# Altium PCB Voeding.PcbDoc
Units mm, origin at the board's own origin, x right, y up, seen from the top; angles counter-clockwise.
Board outline 66.04 x 101.6 mm, 2 copper layers (Top Layer, Bottom Layer); 13 components, 32 nets, 37 pads, 2 vias.
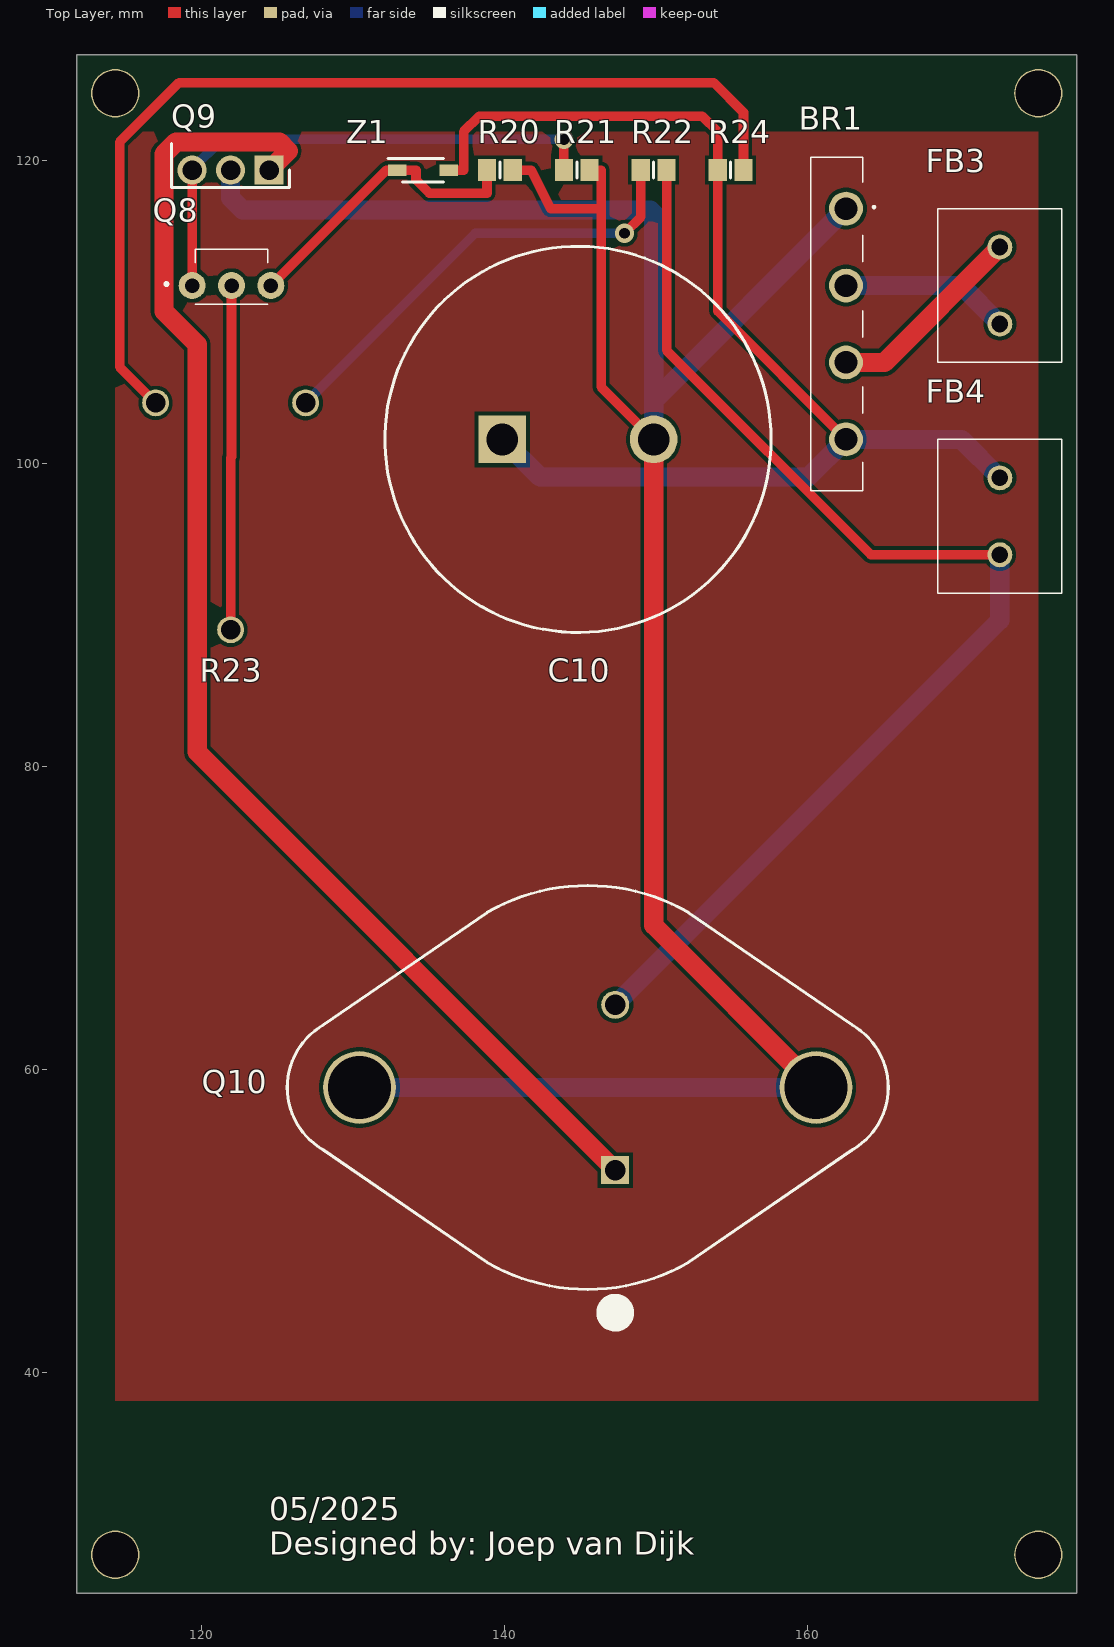
[diagram p0: Top Layer view]
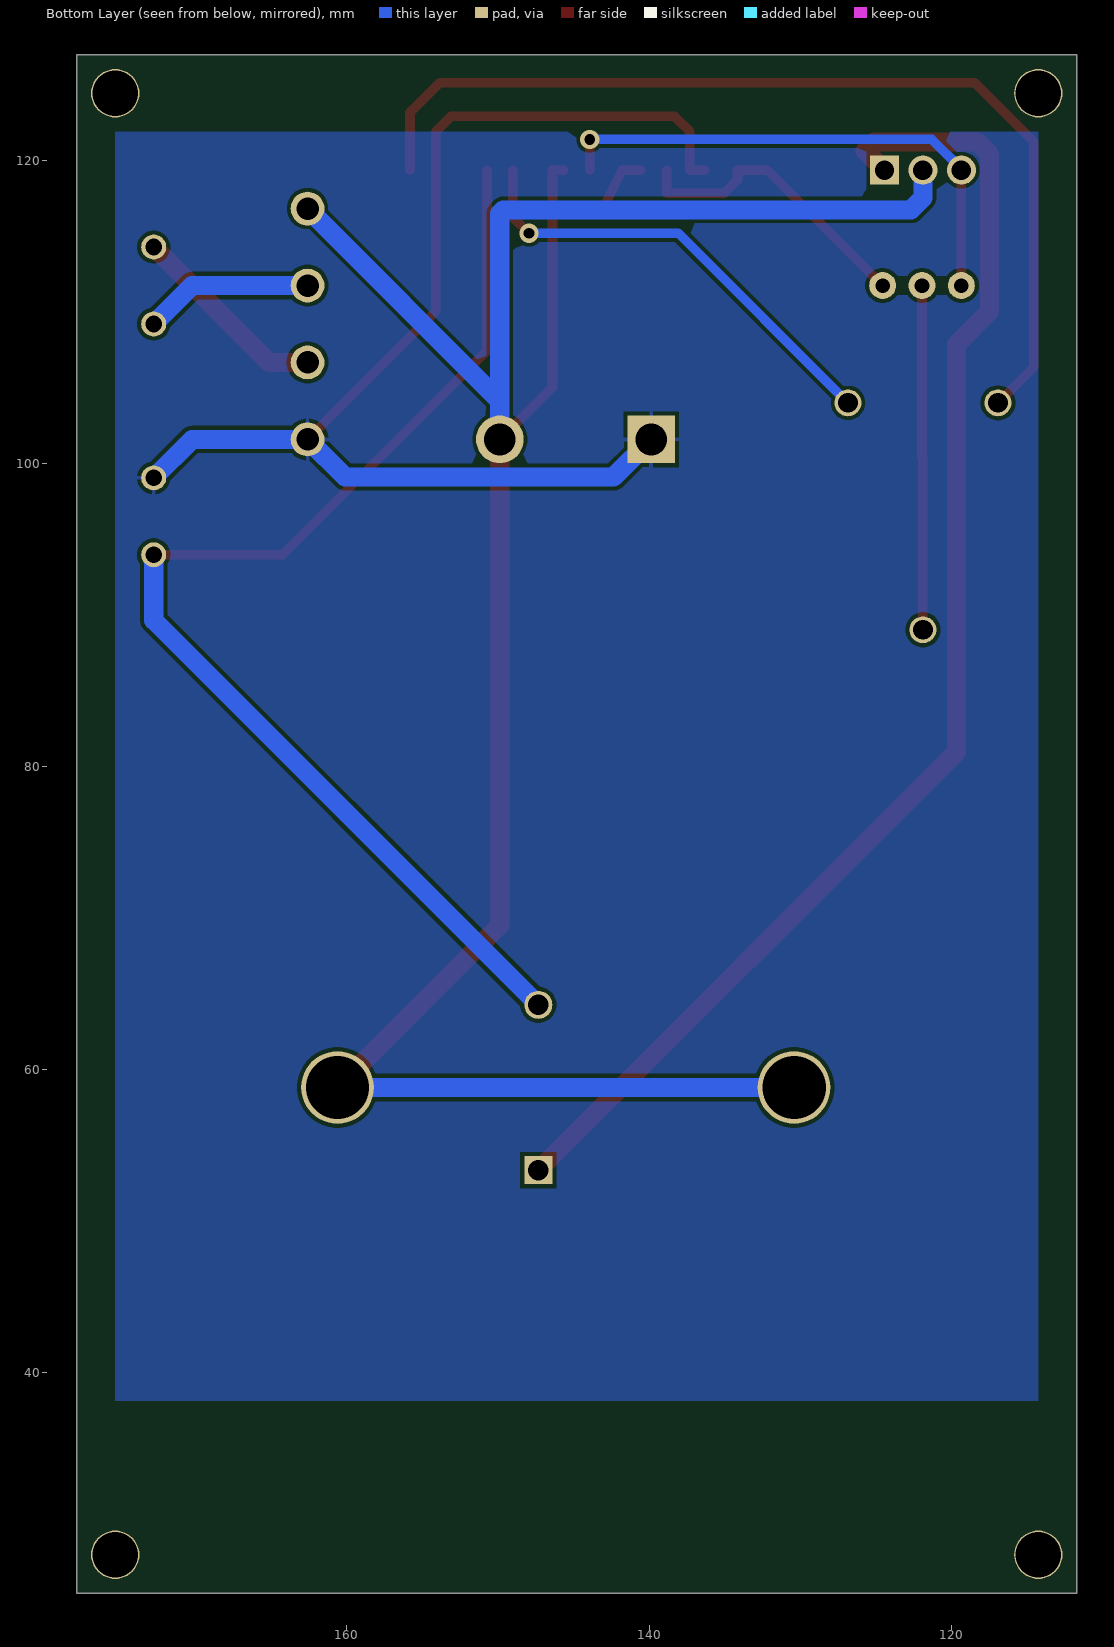
[diagram p1: Bottom Layer view, seen from below]
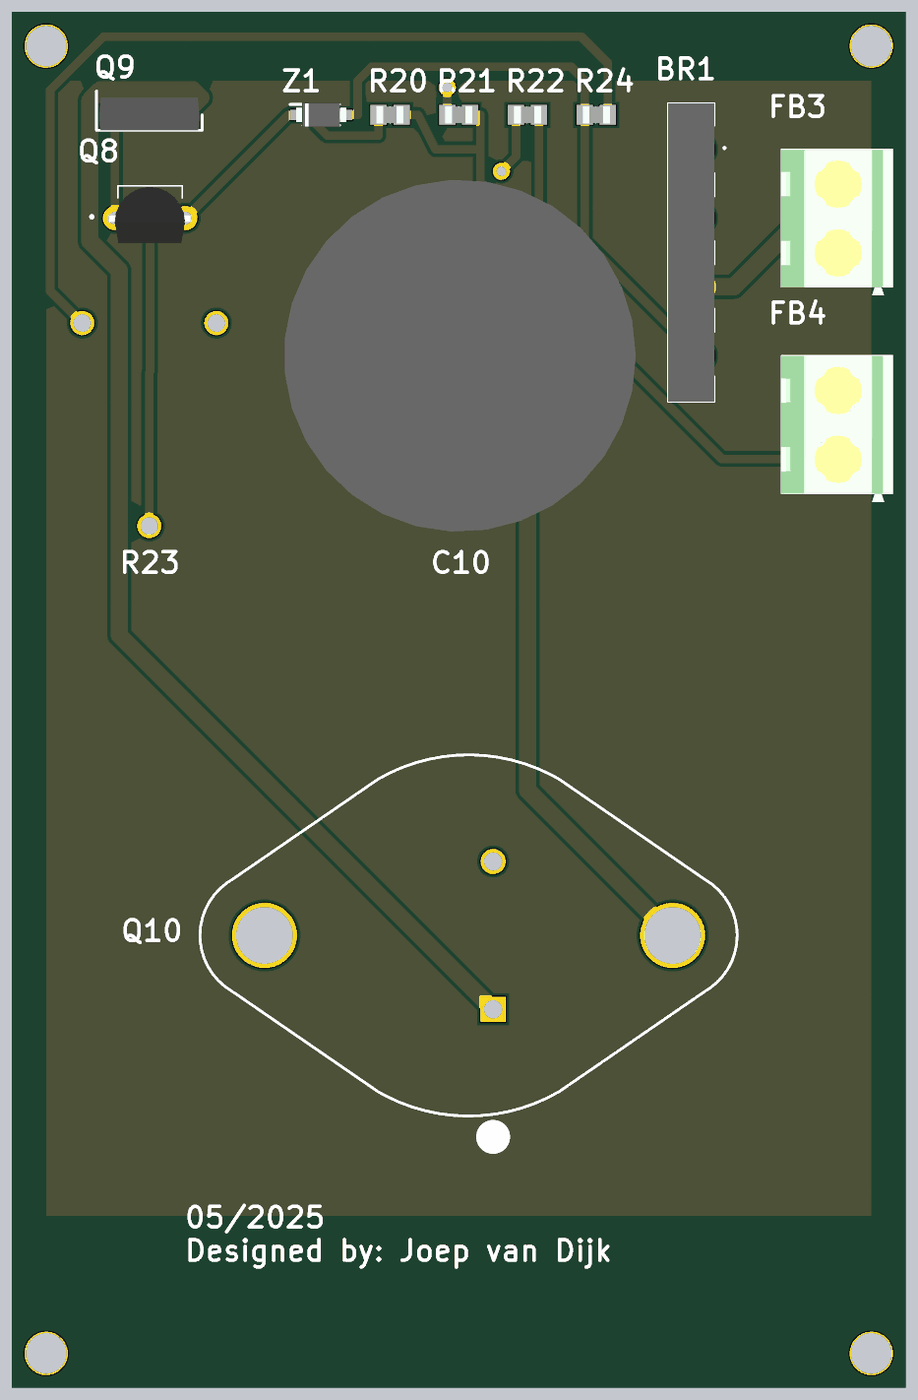
[diagram p2: 3D render of the assembled board from above, using the file's embedded part models]

## Layer stack, top to bottom
Top Solder: solder mask 0.0102, Solder Resist, Dk 3.5
Top Layer: signal copper 0.0356
Dielectric 1: dielectric 0.32, FR-4, Dk 4.8
Bottom Layer: signal copper 0.0356
Bottom Solder: solder mask 0.0102, Solder Resist, Dk 3.5

## Board outline
111.76,25.4 177.8,25.4 177.8,127 111.76,127

## Design rules (kind name [scope] priority, off if disabled: settings)
Clearance [All] p1: gap=0.254 ignorepadtopadclearanceinfootprint=FALSE
Height [All] p1: minheight=0 maxheight=50.8 prefheight=50.8
PolygonConnect [All] p1: connectstyle=Relief reliefconductorwidth=0.254 reliefentries=4 polygonreliefangle="90 Angle" airgapwidth=0.254
RoutingVias [All] p1: holewidth=0.711 width=1.27 viastyle="Through Hole" minholewidth=0.711 minwidth=1.27 maxholewidth=0.711 maxwidth=1.27
SolderMaskExpansion [All] p1: expansion=0.102 istentingtop=FALSE
SupplyNets "Schematic Supply Nets_1" [InNet('VCC')] p1: voltage=0.000
SupplyNets "Schematic Supply Nets" [InNet('GND')] p2: voltage=0.000
Width [All] p1: maxlimit=1.27 minlimit=0.635 preferedwidth=1.27 minimp=50.000000 maximp=50.000000 favimp=50.000000
29 further rules are at their usual default settings.

## Components (designator, comment, footprint, x,y, rotation, side; value= is the part's Value field where it differs from the comment)
BR1 "Bridge Rectifier" GBU4KE351 162.56,116.84 r90 top
C10 "4700uF +" "Elco 4700uF" 139.86,101.6 r0 top
FB3 "Connector" Connector 172.72,114.3 r270 top
FB4 "Connector" Connector 172.72,99.06 r270 top
Q8 "BC547BG" BC547 121.08,112.345 r0 top
Q9 "BD139G" BD139 124.46,119.38 r180 top
Q10 "2N3055A" 2N3055 145.505,58.8 r180 top
R20 "1.5K" 0805 139.7,119.38 r0 top
R21 "22K" 0805 144.78,119.38 r0 top
R22 "3.3K" 0805 149.86,119.38 r0 top
R23 "1K" "Potentiometer 15mm" 121.92,96.52 r180 top
R24 "1.8K" 0805 154.94,119.38 r0 top
Z1 "Zener Diode" "Zener Diode" 134.62,119.38 r0 top

## Footprints (in the part's own frame and the unit in brackets; to place one, negate y for a bottom-side part, rotate by r counter-clockwise, add the part's x,y. Pads: shape width x height; smd on the part's side, far side on the other; paste and mask are expansions set on the pad)
2N3055 [mm] "TO-204, Pin Spacing 10.92mm, Lead Dia. 1.09 mm (max)"
  rect 1.85x1.85 hole 1.35: 1(-1.815,5.46)
  round 1.85 hole 1.35: 2(-1.815,-5.46)
  round 4.8 hole 4.19 mask+0.102: 3(-15.075,0) 4(15.075,0)
  silkscreen extent -19.85,-13.33 19.85,15.5, body extent -19.84,-13.33 19.84,13.33, height 8.51
0805 [mm]
  rect 1.2x1.45 smd: 1(-0.85,0) 2(0.85,0)
  silkscreen extent 0,-0.53 0,0.53, body extent -1,-0.63 1,0.63, height 1.05
BC547 [mm]
  round 1.778 hole 0.96: 1(-1.7,-0.585) 2(0.9,-0.585) 3(3.5,-0.585)
  silkscreen extent -3.5,-1.81 3.28,1.81, body extent -2.2,-2.42 3.96,1.71, height 8.67
BD139 [mm]
  rect 1.92x1.92 hole 1.28: 1(0,0)
  round 1.92 hole 1.28: 2(2.54,0) 3(5.08,0)
  silkscreen extent -1.36,-1.77 6.44,1.13, body extent -1.16,-1.27 6.24,1.13, height 13.08
Connector [mm]
  round 1.65 hole 1.1: 1(0,0) 2(5.08,0)
  silkscreen extent -2.54,-4.1 7.62,4.1, body extent -2.51,-4.11 8.25,4.09, height 9.84
"Elco 4700uF" [mm]
  rect 3.15x3.15 hole 2.1: 1(0,0)
  round 3.15 hole 2.1: 2(10,0)
  silkscreen extent -7.75,-12.75 17.75,12.75, body extent -8,-13 18,13, height 32
GBU4KE351 [mm] "Bridge Rectifier"
  round 2.235 hole 1.49: 1(0,0) 2(-5.08,0) 3(-10.16,0) 4(-15.24,0)
  silkscreen extent -18.64,-1.9 3.4,2.32, body extent -18.64,-1.11 3.4,2.32, height 18.9
"Potentiometer 15mm" [mil]
  round 70 hole 51.18: 1(-195,-295) 2(0,295) 3(195,-295)
  body extent -320,-349 320,345, height 10
"Zener Diode" [mm]
  rect 1.2x0.75 smd: 1(-1.7,0) 2(1.7,0)
  silkscreen extent -2.3,-0.77 1.35,0.77, body extent -1.85,-0.89 1.85,0.89, height 1

## Part data
BR1: library part GBU4K-E3_51, Arrow Part Number=GBU4K-E3/51, Manufacturer_Name=Vishay, Mouser Part Number=625-GBU4K-E3/51, Arrow Price/Stock=https://www.arrow.com/en/products/gbu4k-e351/vishay?region=europe, Datasheet Link=https://4donline.ihs.com/images/VipMasterIC/IC/VISH/VISH-S-A0001811512/VISH-S-A0001811512-1.pdf?hkey=6D3A4C79FDBF58556ACFDE234799DDF0, Height=18.8mm, Manufacturer_Part_Number=GBU4K-E3/51, Mouser Price/Stock=https://www.mouser.co.uk/ProductDetail/Vishay-General-Semiconductor/GBU4K-E3-51?qs=nHKQP18abP9%2FYmEys%252Budwg%3D%3D
C10: library part "Elco 4700uF"
FB3 FB4: "Ferrite Bead", Arrow Part Number=ACML-0805-500-T, Manufacturer_Name=ABRACON, Mouser Part Number=815-ACML-0805-500T, Arrow Price/Stock=https://www.arrow.com/en/products/acml-0805-500-t/abracon, Datasheet Link=https://abracon.com/Magnetics/new/ACML-0805.pdf, Height=1.05mm, Manufacturer_Part_Number=ACML-0805-500-T, Mouser Price/Stock=https://www.mouser.co.uk/ProductDetail/ABRACON/ACML-0805-500-T?qs=qw2lGDycG5tBjukxHQX6NA%3D%3D
Q8: library part "Transistor - BC547", "Amplifier Transistor, NPN Silicon, 3-Pin TO-92, Pb-Free, Bulk Box", Manufacturer="On Semiconductor", ComponentLink1Description="Manufacturer URL", ComponentLink1URL=http://www.onsemi.com/, ComponentLink2Description=Datasheet, ComponentLink2URL=http://www.onsemi.com/pub_link/Collateral/BC546-D.PDF, ComponentLink3Description="Package Specification", ComponentLink3URL=http://www.onsemi.cn/pub_link/Collateral/2N6426-D.PDF, DatasheetVersion="Rev. 7", fT Min (MHz)=150, IC Continuous (A)=0.1, Mounting Technology="Through Hole", PackageDescription="3-Pin Transistor Outline, Body 4.825 x 3.685 mm, Pitch 1.27 mm", PackageReference=TO-92-3-29-11_AM_SL, PackageVersion="Rev. AM", Packing="Bulk Box", PartNumber=BC547BG, Polarity=NPN, RoHS=TRUE
Q9: library part "Transistor - BD139", Case/Package=TO-225, Collector Base Voltage (VCBO)=80V, Collector Emitter Saturation Voltage=500mV, Current Rating=1.5A, Emitter Base Voltage (VEBO)=5V, Manufacturer Lifecycle Status=ACTIVE, Max Junction Temperature (Tj)=150°C, Max Power Dissipation=1.25W, Min Operating Temperature=-55°C, Collector Emitter Breakdown Voltage=80V, Collector Emitter Voltage (VCEO)=80V, Contact Plating=Tin, Element Configuration=Single, Height=11.04mm, hFE Min=25, Lead Free="Lead Free", Length=7.74mm, Lifecycle Status=Production, Max Collector Current=1.5A, Max Operating Temperature=150°C, NexarPartId=354669, Number of Elements=1, Number of Pins=3, Packaging=Bulk, Polarity=NPN, Power Dissipation=1.25W, Radiation Hardening=No, REACH SVHC="No SVHC", RoHS=Compliant, Schedule B="8541290080, 8541290080|8541290080, 8541290080|8541290080|8541290080, 8541290080|8541290080|8541290080|8541290080", Voltage Rating (DC)=80V, Weight=4.535924g, Width=2.66mm
Q10: library part 2N3055, "Complementary Silicon High-Power Transistor, 3-Pin TO-204, Tray", Manufacturer="On Semiconductor", ComponentLink1Description="Manufacturer URL", ComponentLink1URL=http://www.onsemi.com/, ComponentLink2Description=Datasheet, ComponentLink2URL=http://www.onsemi.com/pub_link/Collateral/2N3055A-D.PDF, ComponentLink3Description="Package Specification", ComponentLink3URL=http://www.onsemi.com/pub_link/Collateral/1-07.PDF, DatasheetVersion="Rev. 7", fT Min (MHz)=0.8, IC Continuous (A)=15, Mounting Technology="Through Hole", Note1=0, PackageDescription="2-Pin Transistor Outline, Body 39.37 x 26.67 mm, Pitch 10.92 mm", PackageReference=TO-204-3-1-07, PackageVersion="Rev. Z, 05/1988", Packing=Tray, PartNumber=2N3055A, Polarity=NPN, RoHS=FALSE
R20 R21 R22 R24: library part "Resistor 0805", Manufacturer="Vishay Dale", Part Number=CRCW080510R0FKEA
R23: library part Potentiometer, "249FGJSPXB25503KA Res Cermet POT 50K Ohm 20% 1W 1(Elec)/1(Mech)Turn 6.35mm Pin Panel Mount/Through Hole Bulk", Insulation Resistance=1GΩ, Max Operating Temperature=125°C, Min Operating Temperature=-55°C, Power Rating=1W, Resistance=50kΩ, Temperature Coefficient=100ppm/°C, Tolerance=10%, Voltage Rating=224V, Composition="Cermet, Potentiometer", Contact Plating=Tin, Depth=12.7mm, Height=13.11mm, Hole Diameter=9.525mm, Length=12.7mm, Military Standard=Not, Mount="Panel, Through Hole", NexarPartId=42669055, Number of Gangs=1, Number of Turns=1, REACH SVHC=Unknown, RoHS=Compliant, Termination=Pin, Type=Potentiometer, Width=12.7mm
Z1: Arrow Part Number=MMSZ5245B-7-F, Manufacturer_Name="Diodes Incorporated", Mouser Part Number=621-MMSZ5245B-F, Arrow Price/Stock=https://www.arrow.com/en/products/mmsz5245b-7-f/diodes-incorporated?region=nac, Datasheet Link=https://www.diodes.com//assets/Datasheets/ds18010.pdf, Height=1.45mm, Manufacturer_Part_Number=MMSZ5245B-7-F, Mouser Price/Stock=https://www.mouser.co.uk/ProductDetail/Diodes-Incorporated/MMSZ5245B-7-F?qs=cvwh0phLhFKAGvhg07nX2Q%3D%3D

## Free pads (board coordinates)
  round 3.2 hole 3: 3(114.3,27.94) 3(114.3,124.46) 3(175.26,27.94) 3(175.26,124.46)

## Via types
v1: diameter 1.27, hole 0.711, Top Layer to Bottom Layer, 2 vias

## Nets (pads, with @x,y where several pads share a name; then routed paths per layer and width w, separated by ;. In a path a pad name is that pad's centre, name@x,y a point inside that pad or via, vN(x,y) a via of type N, cw(c..) or ccw(c..) an arc to the next point about the centre after c; other vN are vias at no path point)
GND: BR1.4 C10.1 FB4.1 R24.1 Z1.2 | length 81
  Top Layer w0.635: Z1.2 137.312,119.38 137.312,121.92 138.328,122.936 153.074,122.936 154.09,121.92 R24.1 154.09,110.07 BR1.4
  Bottom Layer w1.27: C10.1 142.349,99.111 160.071,99.111 BR1.4 170.18,101.6 FB4.1
"Net  Z1_1": Q8.3 R20.1 Z1.1 | length 20
  Top Layer w0.635: Q8.3 132.2,119.38 Z1.1 134.163,119.38 134.163,118.745 135.052,117.856 138.85,117.856 R20.1
"Net C8_1": 
"Net C8_2": 
NetBR1_1: BR1.1 C10.2 Q9.2 Q10.3 Q10.4 R20.2 R21.2 | length 167.9
  Top Layer w0.635: R20.2 141.783,119.38 143.053,116.84 146.386,116.84 ; R21.2 146.386,119.38 146.386,116.84 ; C10.2 146.386,105.074 146.386,116.84
  Top Layer w1.27: C10.2 149.86,69.52 Q10.3
  Bottom Layer w1.27: Q9.2 121.92,117.551 122.717,116.754 149.63,116.754 149.86,116.524 149.86,104.14 ; Q10.4 Q10.3 ; C10.2 149.86,104.14 ; BR1.1 149.86,104.14
NetBR1_2: BR1.2 FB3.2 | length 11.2
  Bottom Layer w1.27: BR1.2 170.18,111.76 FB3.2
NetBR1_3: BR1.3 FB3.1 | length 13.3
  Top Layer w1.27: BR1.3 165.1,106.68 FB3.1
NetC1_1: 
NetC1_2: 
NetC2_2: 
NetC4_2: 
NetC5_2: 
NetC6_1: 
NetC6_2: 
NetC9_2: 
NetD1_1: 
NetD1_2: 
NetD2_1: 
NetFB4_2: FB4.2 Q10.2 R22.2 | length 79.7
  Top Layer w0.635: R22.2 150.71,107.481 164.211,93.98 FB4.2
  Bottom Layer w1.27: Q10.2 172.72,89.66 FB4.2
NetQ2_3: 
NetQ3_3: 
NetQ5_2: 
NetQ6_3: 
NetQ8_1: Q8.1 Q9.3 R21.1 | length 35.1
  Top Layer w0.635: Q8.1 Q9.3 ; R21.1 v1(143.93,121.412)
  Bottom Layer w0.635: Q9.3@119.38,119.455 121.337,121.412 v1(143.93,121.412)
  Bottom Layer w1.27: Q9.3 Q9.3@119.38,119.455
NetQ8_2: Q8.2 R23.2 | length 22.8
  Top Layer w0.635: R23.2 121.92,100.381 121.98,100.441 Q8.2
NetQ9_1: Q9.1 Q10.1 | length 90
  Top Layer w1.27: Q9.1 125.73,120.65 125.146,121.234 118.313,121.234 117.526,120.447 117.526,110.058 119.71,107.874 119.71,80.95 Q10.1
NetR5_2: 
NetR13_2: 
NetR16_1: 
NetR22_1: R22.1 R23.1 | length 30.3
  Top Layer w0.635: v1(147.93,115.214) 149.01,116.295 R22.1
  Bottom Layer w0.635: R23.1 138.074,115.214 v1(147.93,115.214)
NetR23_3: R23.3 R24.2 | length 65.7
  Top Layer w0.635: R23.3 114.589,106.391 114.589,121.229 118.515,125.155 153.825,125.155 155.79,123.19 R24.2
VCC: 

## Polygon pours and split planes (outlines as drawn)
VCC on Top Layer "VCC_L01_P000" (solid, pour order 0): 114.3,121.92 175.26,121.92 175.26,38.1 114.3,38.1
GND on Bottom Layer "GND_L02_P001" (solid, pour order 1): 114.3,121.92 175.26,121.92 175.26,38.1 114.3,38.1

## Silkscreen, mask and mechanical layers (free items; w line width, h text height)
Top Overlay:
  text "05/2025 / Designed by: Joep van Dijk" at 124.46,27.94 h1.52